# Altium PCB LED.PcbDoc (part 1 of 2)
Units mm, origin at the board's own origin, x right, y up, seen from the top; angles counter-clockwise.
Board outline 98.55 x 98.96 mm, 2 copper layers (Top Layer, Bottom Layer); 101 components, 40 nets, 660 pads, 300 vias.
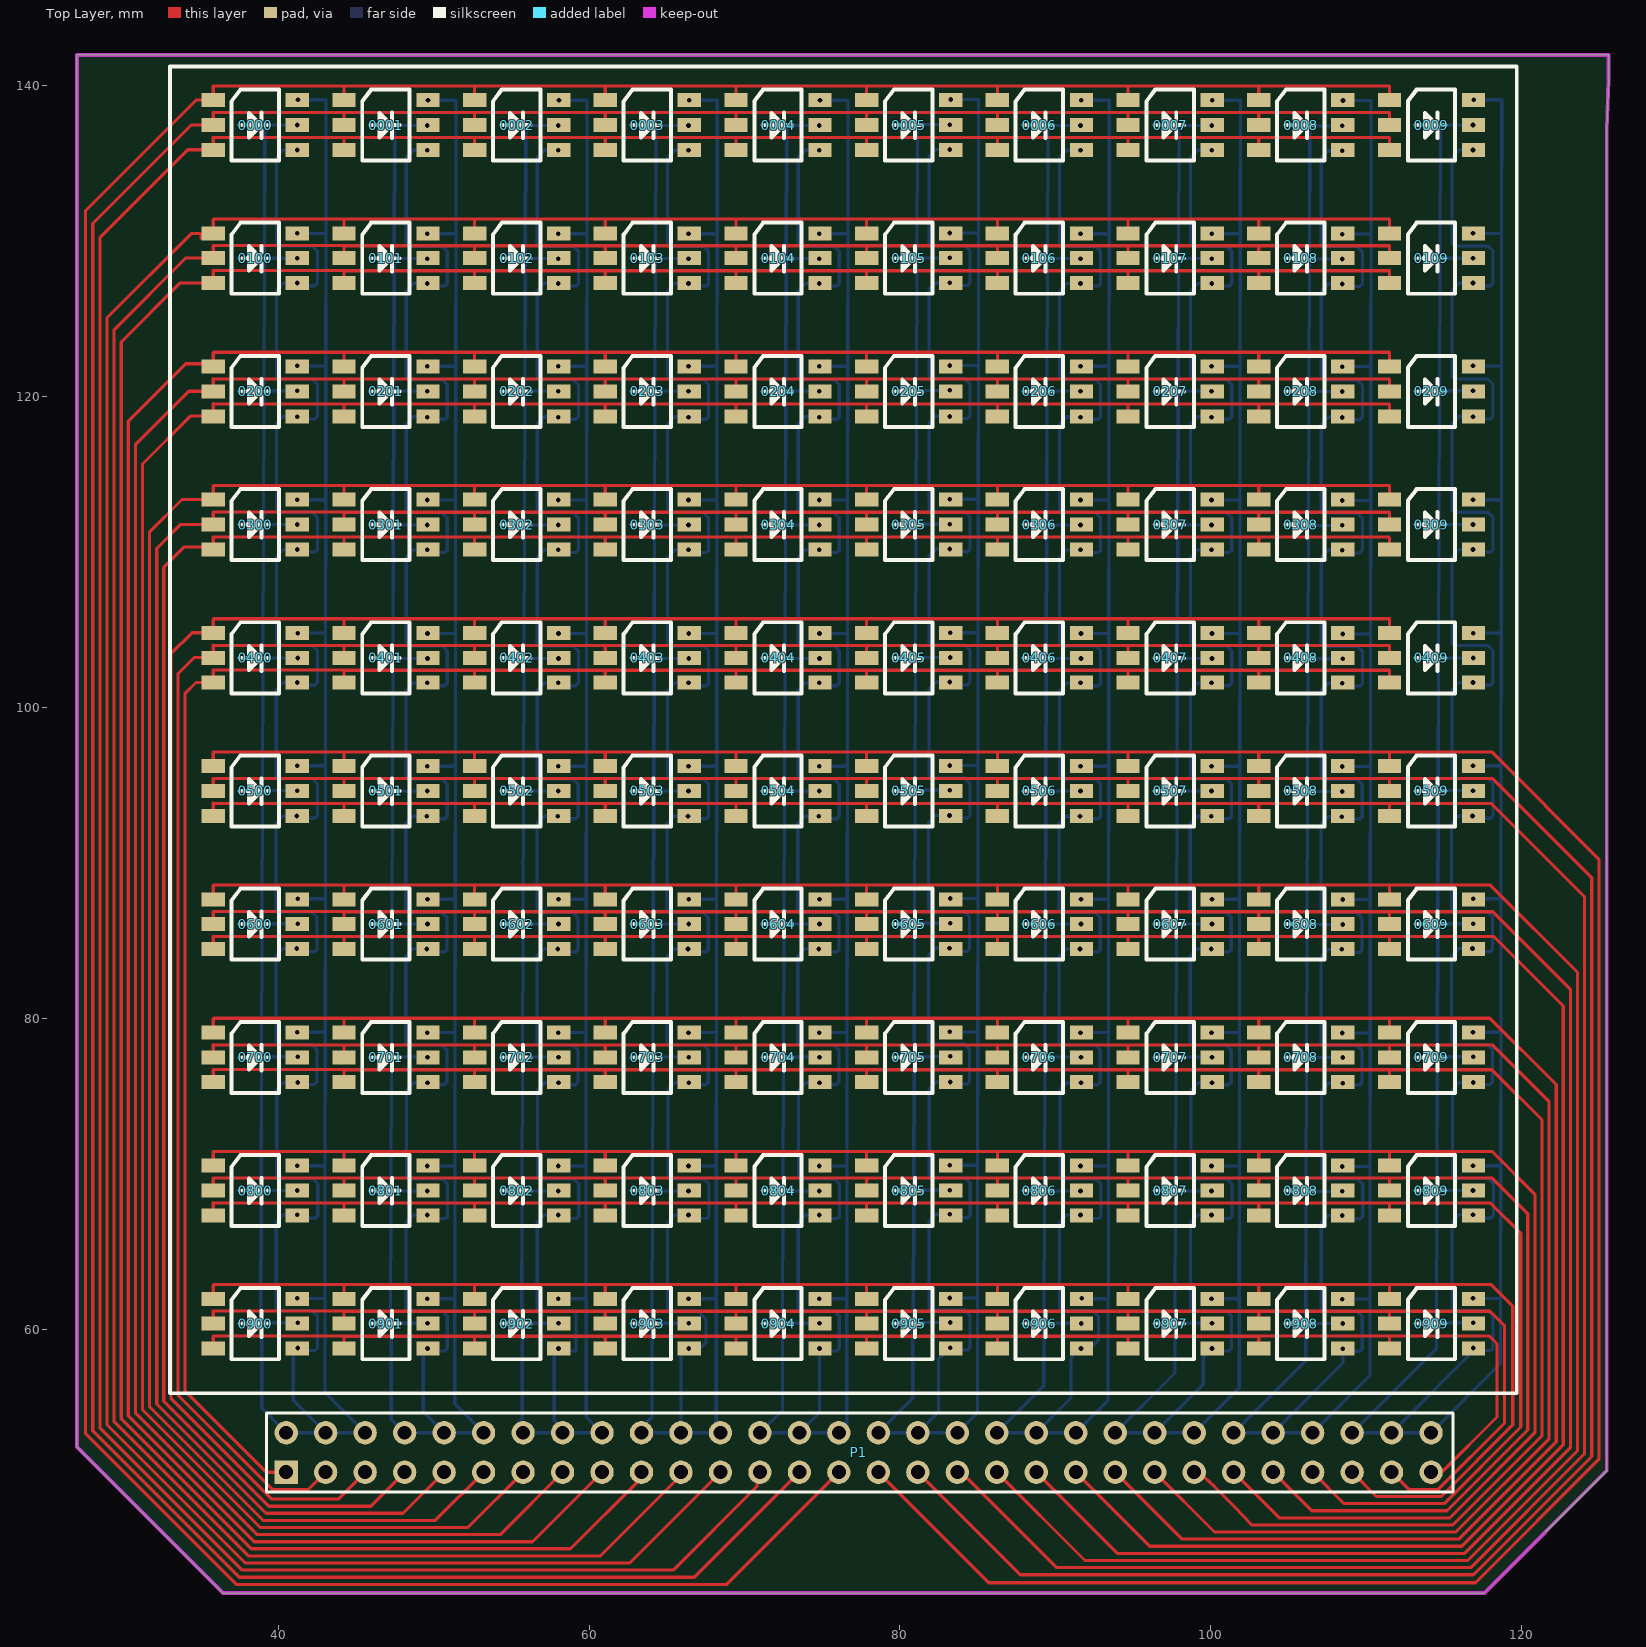
[diagram p0: Top Layer view]
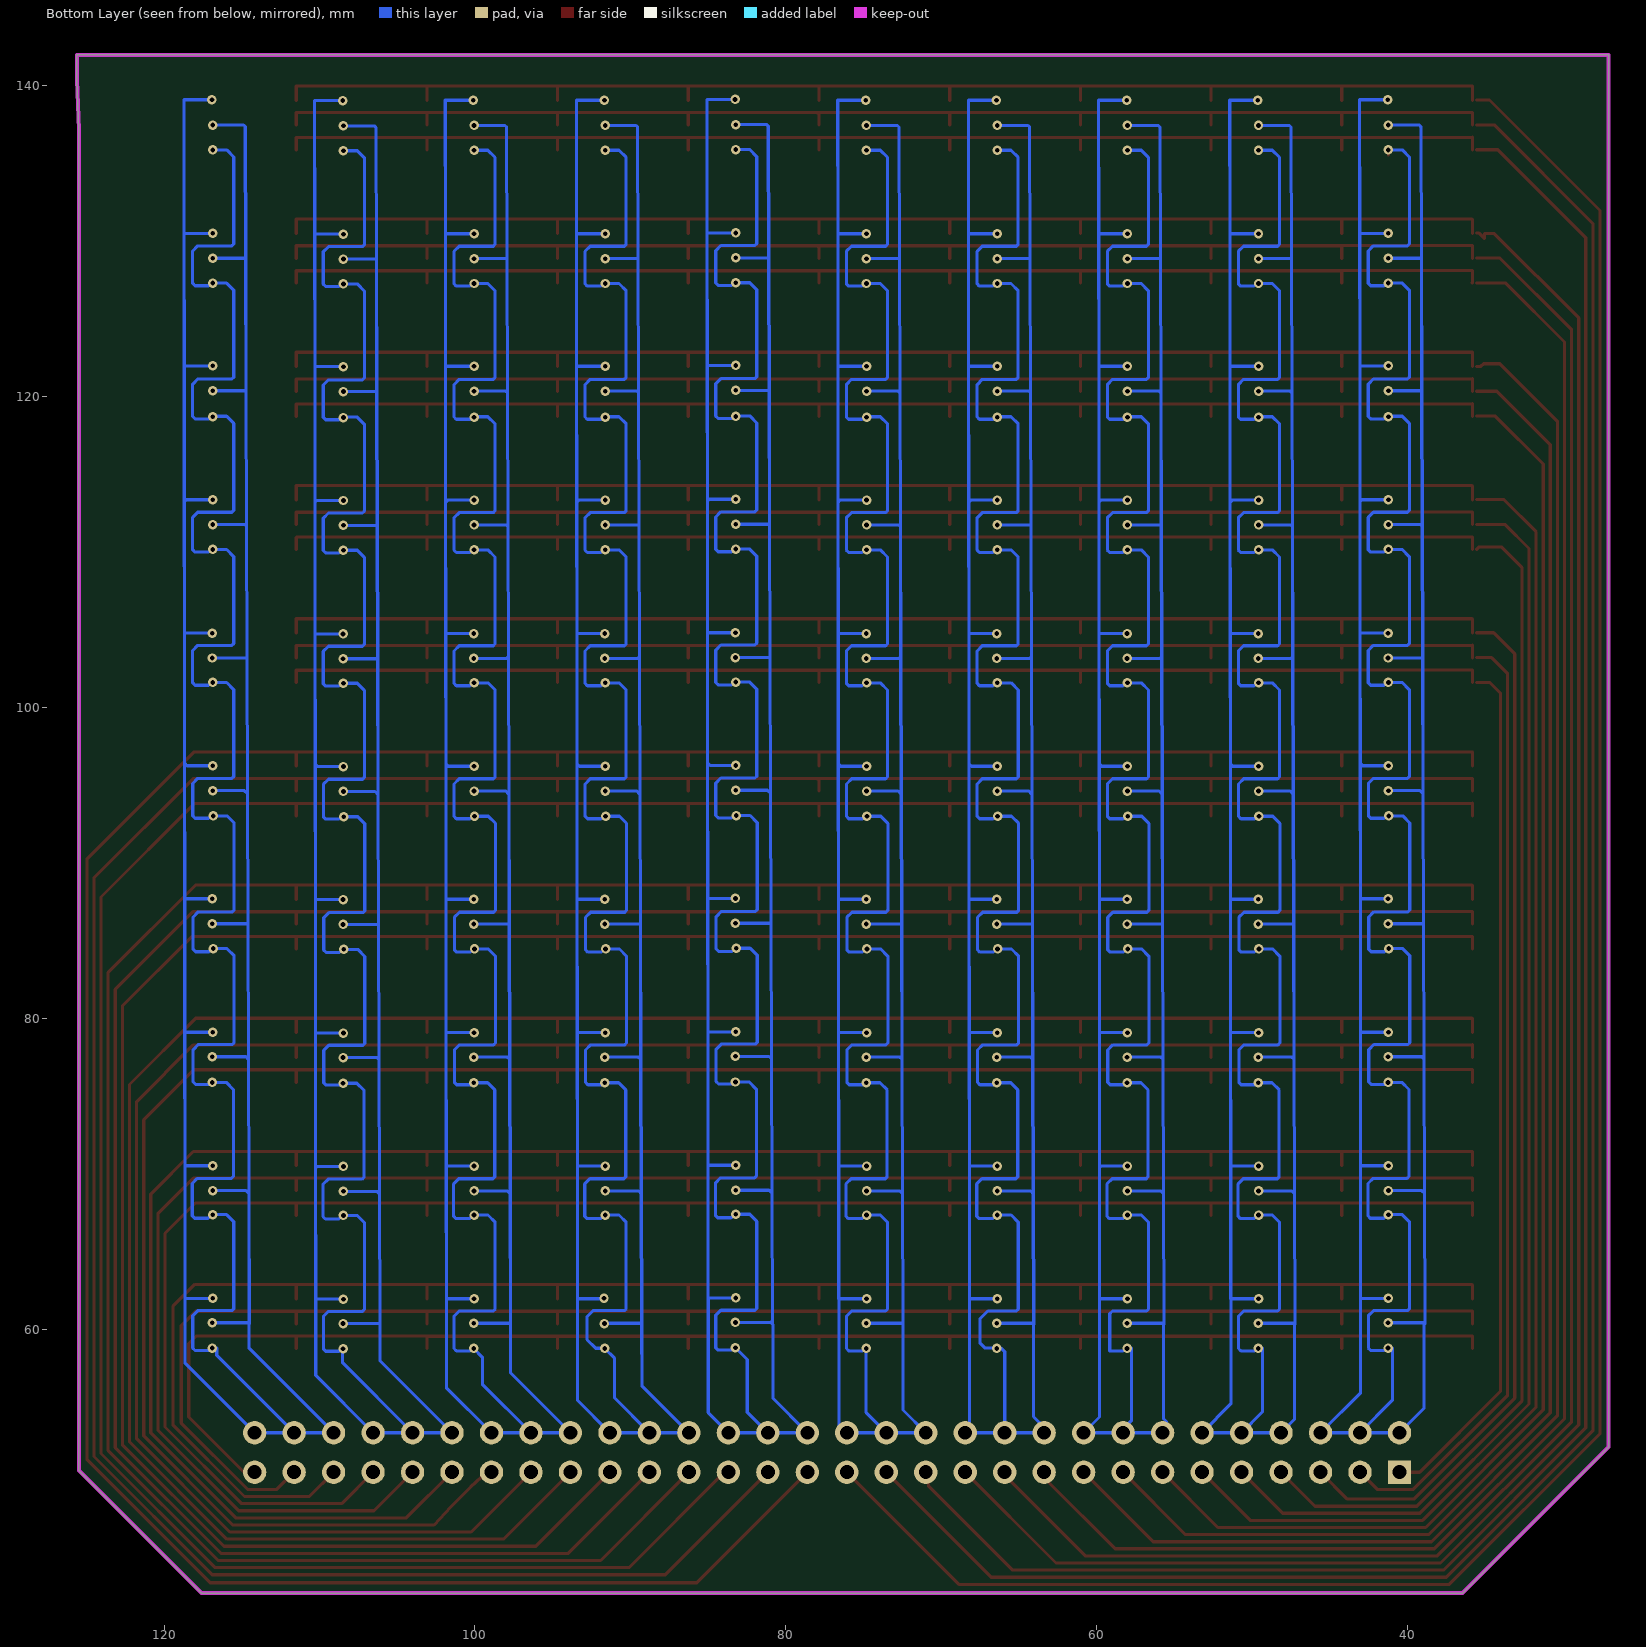
[diagram p1: Bottom Layer view, seen from below]
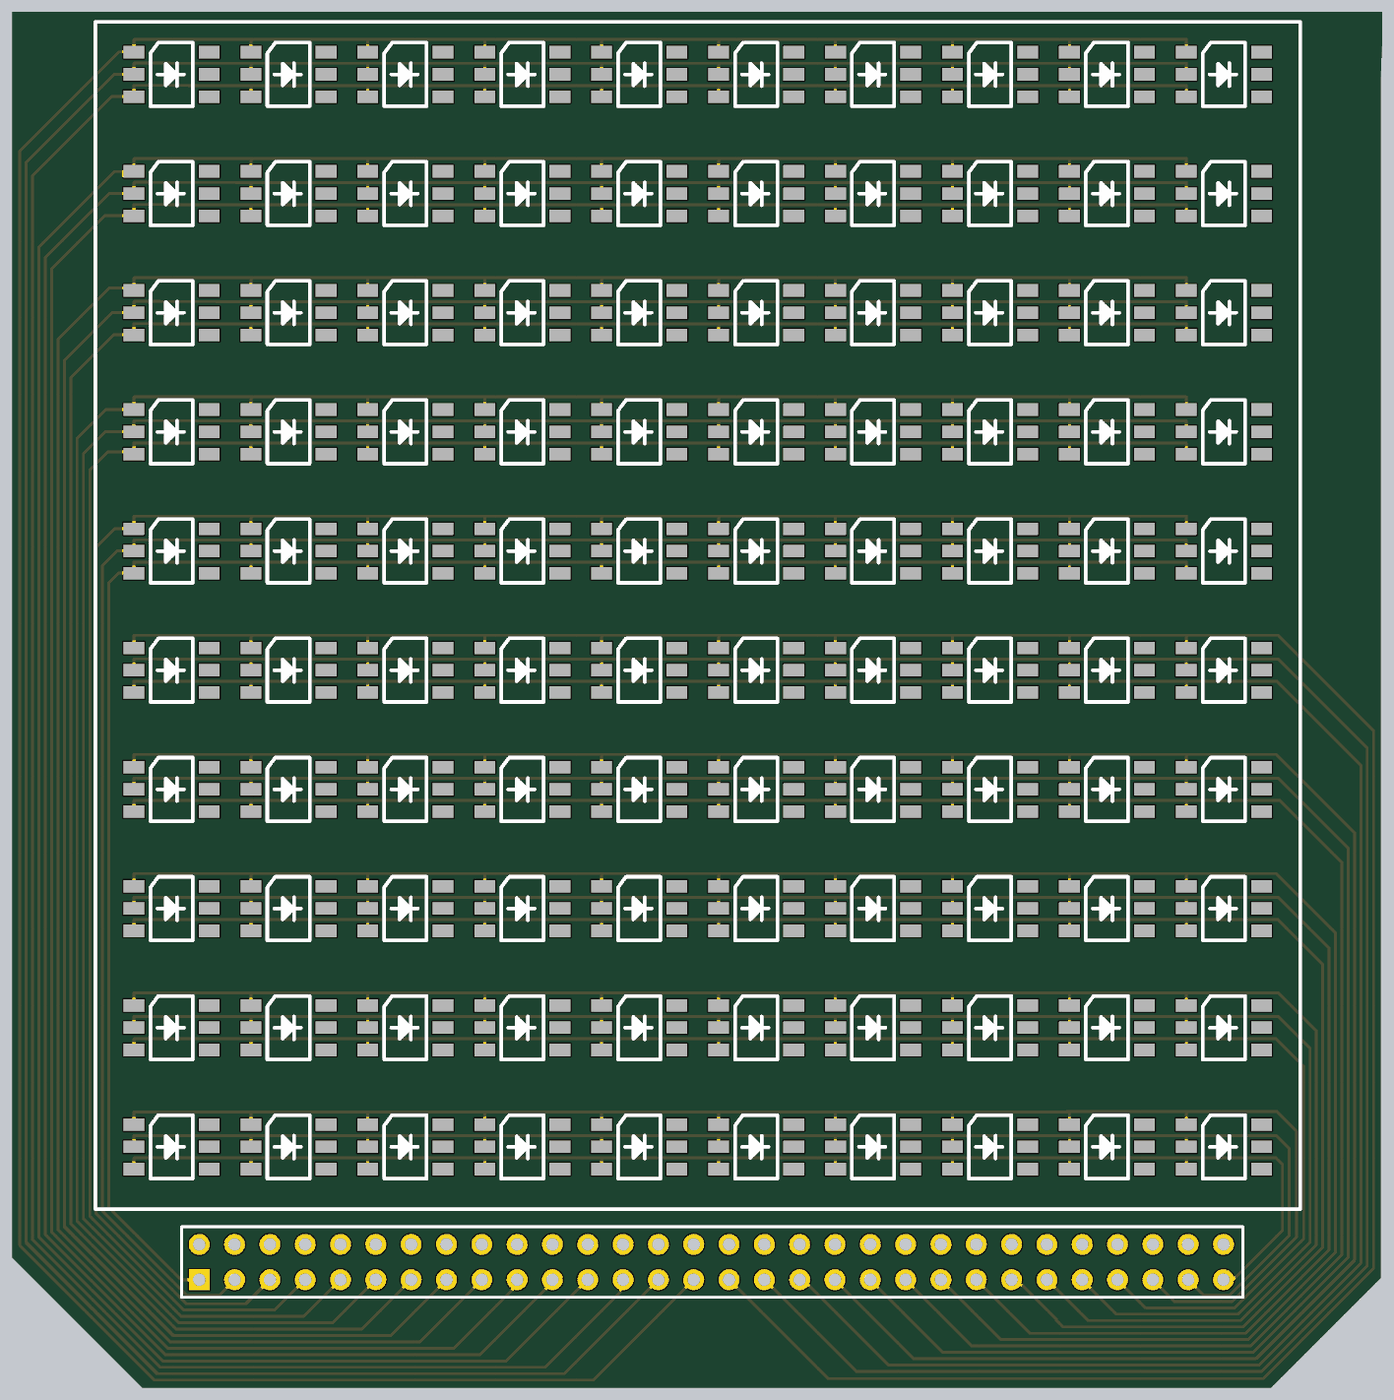
[diagram p3: 3D render of the assembled board from above, using the file's embedded part models]

## Layer stack, top to bottom
Top Solder: solder mask 0.0102, Solder Resist, Dk 3.5
Top Layer: signal copper 0.0356
Dielectric 1: dielectric 0.32, FR-4, Dk 4.8
Bottom Layer: signal copper 0.0356
Bottom Solder: solder mask 0.0102, Solder Resist, Dk 3.5

## Board outline
31.598,47.879 27.051,52.426 27.051,141.986 125.603,141.986 125.603,140.386 125.476,137.185 125.476,50.902 117.602,43.028 36.449,43.028

## Design rules (kind name [scope] priority, off if disabled: settings)
Clearance [All] p1: gap=0.254 ignorepadtopadclearanceinfootprint=FALSE except(0: Arc-Hole Track-Hole SMDPad-Hole THPad-Hole Via-Hole Fill-Hole Poly-Hole Region-Hole Text-Hole; 0.152: Arc-SMDPad Arc-Via Track-SMDPad Track-Via SMDPad-SMDPad SMDPad-Via)
PlaneConnect [All] p1: planeconnectstyle=Direct reliefexpansion=0.508 reliefentries=4 reliefconductorwidth=0.254 reliefairgap=0.254
PolygonConnect [All] p1: connectstyle=Direct reliefconductorwidth=0.254 reliefentries=4 polygonreliefangle="90 Angle" airgapwidth=0.254
RoutingVias [All] p1: holewidth=0.711 width=1.27 viastyle="Through Hole" minholewidth=0.711 minwidth=1.27 maxholewidth=0.711 maxwidth=1.27
SolderMaskExpansion [All] p1: expansion=0.102
Width [All] p1: maxlimit=0.203 minlimit=0.203 preferedwidth=0.203 minimp=50.000000 maximp=50.000000 favimp=50.000000
29 further rules are at their usual default settings.

## Components (designator, comment, footprint, x,y, rotation, side; value= is the part's Value field where it differs from the comment)
0000 "LED-RGB_1" "LED 5050" 38.522,137.477 r0 top
0001 "LED-RGB_1" "LED 5050" 46.931,137.477 r0 top
0002 "LED-RGB_1" "LED 5050" 55.34,137.477 r0 top
0003 "LED-RGB_1" "LED 5050" 63.748,137.477 r0 top
0004 "LED-RGB_1" "LED 5050" 72.157,137.477 r0 top
0005 "LED-RGB_1" "LED 5050" 80.565,137.477 r0 top
0006 "LED-RGB_1" "LED 5050" 88.974,137.477 r0 top
0007 "LED-RGB_1" "LED 5050" 97.382,137.477 r0 top
0008 "LED-RGB_1" "LED 5050" 105.791,137.477 r0 top
0009 "LED-RGB_1" "LED 5050" 114.199,137.477 r0 top
0100 "LED-RGB_1" "LED 5050" 38.522,128.908 r0 top
0101 "LED-RGB_1" "LED 5050" 46.931,128.908 r0 top
0102 "LED-RGB_1" "LED 5050" 55.34,128.908 r0 top
0103 "LED-RGB_1" "LED 5050" 63.748,128.908 r0 top
0104 "LED-RGB_1" "LED 5050" 72.157,128.908 r0 top
0105 "LED-RGB_1" "LED 5050" 80.565,128.908 r0 top
0106 "LED-RGB_1" "LED 5050" 88.974,128.908 r0 top
0107 "LED-RGB_1" "LED 5050" 97.382,128.908 r0 top
0108 "LED-RGB_1" "LED 5050" 105.791,128.908 r0 top
0109 "LED-RGB_1" "LED 5050" 114.199,128.908 r0 top
0200 "LED-RGB_1" "LED 5050" 38.522,120.338 r0 top
0201 "LED-RGB_1" "LED 5050" 46.931,120.338 r0 top
0202 "LED-RGB_1" "LED 5050" 55.34,120.338 r0 top
0203 "LED-RGB_1" "LED 5050" 63.748,120.338 r0 top
0204 "LED-RGB_1" "LED 5050" 72.157,120.338 r0 top
0205 "LED-RGB_1" "LED 5050" 80.565,120.338 r0 top
0206 "LED-RGB_1" "LED 5050" 88.974,120.338 r0 top
0207 "LED-RGB_1" "LED 5050" 97.382,120.338 r0 top
0208 "LED-RGB_1" "LED 5050" 105.791,120.338 r0 top
0209 "LED-RGB_1" "LED 5050" 114.199,120.338 r0 top
0300 "LED-RGB_1" "LED 5050" 38.522,111.769 r0 top
0301 "LED-RGB_1" "LED 5050" 46.931,111.769 r0 top
0302 "LED-RGB_1" "LED 5050" 55.34,111.769 r0 top
0303 "LED-RGB_1" "LED 5050" 63.748,111.769 r0 top
0304 "LED-RGB_1" "LED 5050" 72.157,111.769 r0 top
0305 "LED-RGB_1" "LED 5050" 80.565,111.769 r0 top
0306 "LED-RGB_1" "LED 5050" 88.974,111.769 r0 top
0307 "LED-RGB_1" "LED 5050" 97.382,111.769 r0 top
0308 "LED-RGB_1" "LED 5050" 105.791,111.769 r0 top
0309 "LED-RGB_1" "LED 5050" 114.199,111.769 r0 top
0400 "LED-RGB_1" "LED 5050" 38.522,103.2 r0 top
0401 "LED-RGB_1" "LED 5050" 46.931,103.2 r0 top
0402 "LED-RGB_1" "LED 5050" 55.34,103.2 r0 top
0403 "LED-RGB_1" "LED 5050" 63.748,103.2 r0 top
0404 "LED-RGB_1" "LED 5050" 72.157,103.2 r0 top
0405 "LED-RGB_1" "LED 5050" 80.565,103.2 r0 top
0406 "LED-RGB_1" "LED 5050" 88.974,103.2 r0 top
0407 "LED-RGB_1" "LED 5050" 97.382,103.2 r0 top
0408 "LED-RGB_1" "LED 5050" 105.791,103.2 r0 top
0409 "LED-RGB_1" "LED 5050" 114.199,103.2 r0 top
0500 "LED-RGB_1" "LED 5050" 38.522,94.631 r0 top
0501 "LED-RGB_1" "LED 5050" 46.931,94.631 r0 top
0502 "LED-RGB_1" "LED 5050" 55.34,94.631 r0 top
0503 "LED-RGB_1" "LED 5050" 63.748,94.631 r0 top
0504 "LED-RGB_1" "LED 5050" 72.157,94.631 r0 top
0505 "LED-RGB_1" "LED 5050" 80.565,94.631 r0 top
0506 "LED-RGB_1" "LED 5050" 88.974,94.631 r0 top
0507 "LED-RGB_1" "LED 5050" 97.382,94.631 r0 top
0508 "LED-RGB_1" "LED 5050" 105.791,94.631 r0 top
0509 "LED-RGB_1" "LED 5050" 114.199,94.631 r0 top
0600 "LED-RGB_1" "LED 5050" 38.522,86.062 r0 top
0601 "LED-RGB_1" "LED 5050" 46.931,86.062 r0 top
0602 "LED-RGB_1" "LED 5050" 55.34,86.062 r0 top
0603 "LED-RGB_1" "LED 5050" 63.748,86.062 r0 top
0604 "LED-RGB_1" "LED 5050" 72.157,86.062 r0 top
0605 "LED-RGB_1" "LED 5050" 80.565,86.062 r0 top
0606 "LED-RGB_1" "LED 5050" 88.974,86.062 r0 top
0607 "LED-RGB_1" "LED 5050" 97.382,86.062 r0 top
0608 "LED-RGB_1" "LED 5050" 105.791,86.062 r0 top
0609 "LED-RGB_1" "LED 5050" 114.199,86.062 r0 top
0700 "LED-RGB_1" "LED 5050" 38.522,77.493 r0 top
0701 "LED-RGB_1" "LED 5050" 46.931,77.493 r0 top
0702 "LED-RGB_1" "LED 5050" 55.34,77.493 r0 top
0703 "LED-RGB_1" "LED 5050" 63.748,77.493 r0 top
0704 "LED-RGB_1" "LED 5050" 72.157,77.493 r0 top
0705 "LED-RGB_1" "LED 5050" 80.565,77.493 r0 top
0706 "LED-RGB_1" "LED 5050" 88.974,77.493 r0 top
0707 "LED-RGB_1" "LED 5050" 97.382,77.493 r0 top
0708 "LED-RGB_1" "LED 5050" 105.791,77.493 r0 top
0709 "LED-RGB_1" "LED 5050" 114.199,77.493 r0 top
0800 "LED-RGB_1" "LED 5050" 38.522,68.924 r0 top
0801 "LED-RGB_1" "LED 5050" 46.931,68.924 r0 top
0802 "LED-RGB_1" "LED 5050" 55.34,68.924 r0 top
0803 "LED-RGB_1" "LED 5050" 63.748,68.924 r0 top
0804 "LED-RGB_1" "LED 5050" 72.157,68.924 r0 top
0805 "LED-RGB_1" "LED 5050" 80.565,68.924 r0 top
0806 "LED-RGB_1" "LED 5050" 88.974,68.924 r0 top
0807 "LED-RGB_1" "LED 5050" 97.382,68.924 r0 top
0808 "LED-RGB_1" "LED 5050" 105.791,68.924 r0 top
0809 "LED-RGB_1" "LED 5050" 114.199,68.924 r0 top
0900 "LED-RGB_1" "LED 5050" 38.522,60.355 r0 top
0901 "LED-RGB_1" "LED 5050" 46.931,60.355 r0 top
0902 "LED-RGB_1" "LED 5050" 55.34,60.355 r0 top
0903 "LED-RGB_1" "LED 5050" 63.748,60.355 r0 top
0904 "LED-RGB_1" "LED 5050" 72.157,60.355 r0 top
0905 "LED-RGB_1" "LED 5050" 80.565,60.355 r0 top
0906 "LED-RGB_1" "LED 5050" 88.974,60.355 r0 top
0907 "LED-RGB_1" "LED 5050" 97.382,60.355 r0 top
0908 "LED-RGB_1" "LED 5050" 105.791,60.355 r0 top
0909 "LED-RGB_1" "LED 5050" 114.199,60.355 r0 top
P1 "Header 30X2" HDR2X30 40.513,50.8 r0 top

## Footprints (in the part's own frame and the unit in brackets; to place one, negate y for a bottom-side part, rotate by r counter-clockwise, add the part's x,y. Pads: shape width x height; smd on the part's side, far side on the other; paste and mask are expansions set on the pad)
HDR2X30 [mm] "Connector; Header; 30x2 Position"
  rect 1.5x1.5 hole 0.9: 1(0,0)
  round 1.5 hole 0.9: 2(0,2.54) 3(2.54,0) 4(2.54,2.54) 5(5.08,0) 6(5.08,2.54) 7(7.62,0) 8(7.62,2.54) 9(10.16,0) 10(10.16,2.54) 11(12.7,0) 12(12.7,2.54) 13(15.24,0) 14(15.24,2.54) 15(17.78,0) 16(17.78,2.54) 17(20.32,0) 18(20.32,2.54) 19(22.86,0) 20(22.86,2.54) 21(25.4,0) 22(25.4,2.54) 23(27.94,0) 24(27.94,2.54) 25(30.48,0) 26(30.48,2.54) 27(33.02,0) 28(33.02,2.54) 29(35.56,0) 30(35.56,2.54) 31(38.1,0) 32(38.1,2.54) 33(40.64,0) 34(40.64,2.54) 35(43.18,0) 36(43.18,2.54) 37(45.72,0) 38(45.72,2.54) 39(48.26,0) 40(48.26,2.54) 41(50.8,0) 42(50.8,2.54) 43(53.34,0) 44(53.34,2.54) 45(55.88,0) 46(55.88,2.54) 47(58.42,0) 48(58.42,2.54) 49(60.96,0) 50(60.96,2.54) 51(63.5,0) 52(63.5,2.54) 53(66.04,0) 54(66.04,2.54) 55(68.58,0) 56(68.58,2.54) 57(71.12,0) 58(71.12,2.54) 59(73.66,0) 60(73.66,2.54)
  silkscreen extent -1.27,-1.27 75.06,3.81
"LED 5050" [mm] "白色5050LED"
  rect 1.5x0.9 smd: 1(-2.705,1.6) 2(2.705,1.6) 3(-2.705,0) 4(2.705,0) 5(-2.705,-1.6) 6(2.705,-1.6)
  silkscreen extent -1.52,-2.29 1.52,2.29, body extent -2.7,-2.5 2.7,2.5, height 1.65

## Part data
0000 0001 0002 0003 0004 0005 0006 0007 0008 0009 0100 0101 0102 0103 0104 0105 0106 0107 0108 0109 0200 0201 0202 0203 0204 0205 0206 0207 0208 0209 0300 0301 0302 0303 0304 0305 0306 0307 0308 0309 0400 0401 0402 0403 0404 0405 0406 0407 0408 0409 0500 0501 0502 0503 0504 0505 0506 0507 0508 0509 0600 0601 0602 0603 0604 0605 0606 0607 0608 0609 0700 0701 0702 0703 0704 0705 0706 0707 0708 0709 0800 0801 0802 0803 0804 0805 0806 0807 0808 0809 0900 0901 0902 0903 0904 0905 0906 0907 0908 0909: "三基色LED,正负脚相对", 学习资源=www.o
P1: "Header, 30-Pin, Dual row", LatestRevisionDate=17-Jul-2002, LatestRevisionNote="Re-released for DXP Platform.", Publisher="Altium Limited"

## Via types
v1: diameter 0.61, hole 0.305, Top Layer to Bottom Layer, 300 vias

## Nets (pads, with @x,y where several pads share a name; then routed paths per layer and width w, separated by ;. In a path a pad name is that pad's centre, name@x,y a point inside that pad or via, vN(x,y) a via of type N, cw(c..) or ccw(c..) an arc to the next point about the centre after c; other vN are vias at no path point)
A00B: 0000.1 0001.1 0002.1 0003.1 0004.1 0005.1 0006.1 0007.1 0008.1 0009.1 P1.29 | length 229.9
  Top Layer w0.203: 0000.1@35.538,139.09 34.722,139.09 27.61,131.978 27.61,53.28 37.303,43.586 68.859,43.586 P1.29@76.073,50.8 ; 0000.1@35.817,139.077 35.817,139.969 35.84,139.991 44.272,139.991 ; 0001.1@44.226,139.077 44.226,139.945 44.272,139.991 ; 0002.1@52.634,139.077 52.634,139.921 52.705,139.991 ; 0003.1@61.043,139.077 61.043,139.984 61.036,139.991 ; 0004.1@69.452,139.077 69.452,139.983 69.444,139.991 ; 0005.1@77.86,139.077 77.86,139.975 77.877,139.991 ; 0006.1@86.269,139.077 86.269,139.981 86.259,139.991 ; 0007.1@94.677,139.077 94.677,139.977 94.691,139.991 ; 0008.1@103.086,139.077 103.086,139.966 103.111,139.991 ; 0009.1@111.494,139.077 111.494,139.954 ; 111.494,139.991 103.111,139.991 ; 44.272,139.991 52.705,139.991 ; 52.705,139.991 61.036,139.991 ; 61.036,139.991 69.444,139.991 ; 69.444,139.991 77.877,139.991 ; 77.877,139.991 86.259,139.991 ; 86.259,139.991 94.691,139.991 ; 94.691,139.991 103.111,139.991
A00G: 0000.5 0001.5 0002.5 0003.5 0004.5 0005.5 0006.5 0007.5 0008.5 0009.5 P1.25 | length 219
  Top Layer w0.203: 0000.5@35.538,135.89 34.188,135.89 28.524,130.226 28.524,53.659 37.682,44.501 65.405,44.501 70.806,49.902 70.806,50.613 P1.25@70.993,50.8 ; 0000.5@35.817,135.876 35.817,136.685 35.814,136.688 44.247,136.675 ; 0001.5@44.226,135.876 44.226,136.654 44.247,136.675 ; 0002.5@52.634,135.876 52.634,136.619 52.578,136.675 ; 0003.5@61.043,135.876 61.043,136.631 61.087,136.675 ; 0004.5@69.452,135.876 69.452,136.642 69.418,136.675 ; 0005.5@77.86,135.876 77.86,136.659 77.877,136.675 ; 0006.5@86.269,135.876 86.269,136.64 86.233,136.675 ; 0007.5@94.677,135.876 94.677,136.638 94.641,136.675 ; 0008.5@103.086,135.876 103.086,136.675 ; 0009.5@111.494,135.876 111.494,136.675 103.086,136.675 ; 44.247,136.675 52.578,136.675 ; 52.578,136.675 61.087,136.675 ; 61.087,136.675 69.418,136.675 ; 69.418,136.675 77.877,136.675 ; 77.877,136.675 86.233,136.675 ; 86.233,136.675 94.641,136.675 ; 94.641,136.675 103.086,136.675
A00R: 0000.3 0001.3 0002.3 0003.3 0004.3 0005.3 0006.3 0007.3 0008.3 0009.3 P1.27 | length 223.7
  Top Layer w0.203: 0000.3@35.538,137.49 34.417,137.49 28.067,131.14 28.067,53.469 37.493,44.044 66.777,44.044 P1.27@73.533,50.8 ; 0000.3@35.817,137.477 35.817,138.285 35.814,138.288 44.272,138.275 ; 0001.3@44.226,137.477 44.226,138.229 44.272,138.275 ; 0002.3@52.634,137.477 52.634,138.23 52.68,138.275 ; 0003.3@61.043,137.477 61.043,138.192 60.96,138.275 ; 0004.3@69.452,137.477 69.452,138.267 69.444,138.275 ; 0005.3@77.86,137.477 77.86,138.157 77.978,138.275 ; 0006.3@86.269,137.477 86.269,138.235 86.309,138.275 ; 0007.3@94.677,137.477 94.677,138.264 94.666,138.275 ; 0008.3@103.086,137.477 103.086,138.25 103.111,138.275 ; 0009.3@111.494,137.477 111.494,138.213 ; 111.494,138.275 103.111,138.275 ; 44.272,138.275 52.68,138.275 ; 52.68,138.275 60.96,138.275 ; 60.96,138.275 69.444,138.275 ; 69.444,138.275 77.978,138.275 ; 77.978,138.275 86.309,138.275 ; 86.309,138.275 94.666,138.275 ; 94.666,138.275 103.111,138.275
A01B: 0100.1 0101.1 0102.1 0103.1 0104.1 0105.1 0106.1 0107.1 0108.1 0109.1 P1.23 | length 210.9
  Top Layer w0.203: 0100.1@35.538,130.521 35.389,130.521 35.041,130.173 35.041,130.495 34.406,130.495 28.981,125.07 28.981,53.848 37.871,44.958 62.611,44.958 P1.23@68.453,50.8 ; 0100.1@35.814,130.511 0100.1@35.817,130.508 35.817,131.4 35.84,131.422 44.272,131.422 ; 0101.1@44.226,130.508 44.226,131.376 44.272,131.422 ; 0102.1@52.634,130.508 52.634,131.351 52.705,131.422 ; 0103.1@61.043,130.508 61.043,131.415 61.036,131.422 ; 0104.1@69.452,130.508 69.452,131.414 69.444,131.422 ; 0105.1@77.86,130.508 77.86,131.406 77.877,131.422 ; 0106.1@86.269,130.508 86.269,131.412 86.259,131.422 ; 0107.1@94.677,130.508 94.677,131.408 94.691,131.422 ; 0108.1@103.086,130.508 103.086,131.396 103.111,131.422 ; 0109.1@111.494,130.508 111.494,131.385 ; 111.494,131.422 103.111,131.422 ; 44.272,131.422 52.705,131.422 ; 52.705,131.422 61.036,131.422 ; 61.036,131.422 69.444,131.422 ; 69.444,131.422 77.877,131.422 ; 77.877,131.422 86.259,131.422 ; 86.259,131.422 94.691,131.422 ; 94.691,131.422 103.111,131.422
A01G: 0100.5 0101.5 0102.5 0103.5 0104.5 0105.5 0106.5 0107.5 0108.5 0109.5 P1.19 | length 199.5
  Top Layer w0.203: 0100.5@35.538,127.321 33.697,127.321 29.896,123.52 29.896,54.242 38.265,45.872 58.801,45.872 63.125,50.196 63.125,50.552 P1.19@63.373,50.8 ; 0100.5@35.84,127.329 0100.5@35.817,127.307 35.817,128.116 35.814,128.119 44.247,128.106 ; 0101.5@44.226,127.307 44.226,128.085 44.247,128.106 ; 0102.5@52.634,127.307 52.634,128.05 52.578,128.106 ; 0103.5@61.043,127.307 61.043,128.062 61.087,128.106 ; 0104.5@69.452,127.307 69.452,128.073 69.418,128.106 ; 0105.5@77.86,127.307 77.86,128.09 77.877,128.106 ; 0106.5@86.269,127.307 86.269,128.07 86.233,128.106 ; 0107.5@94.677,127.307 94.677,128.069 94.641,128.106 ; 0108.5@103.086,127.307 103.086,128.106 ; 0109.5@111.494,127.307 111.494,128.106 103.086,128.106 ; 44.247,128.106 52.578,128.106 ; 52.578,128.106 61.087,128.106 ; 61.087,128.106 69.418,128.106 ; 69.418,128.106 77.877,128.106 ; 77.877,128.106 86.233,128.106 ; 86.233,128.106 94.641,128.106 ; 94.641,128.106 103.086,128.106
A01R: 0100.3 0101.3 0102.3 0103.3 0104.3 0105.3 0106.3 0107.3 0108.3 0109.3 P1.21 | length 204.4
  Top Layer w0.203: 0100.3@35.538,128.921 34.052,128.921 29.439,124.308 29.439,54.052 38.076,45.415 60.731,45.415 65.913,50.597 P1.21@65.913,50.8 ; 0100.3@35.817,128.908 35.817,129.716 35.814,129.719 44.272,129.706 ; 0101.3@44.226,128.908 44.226,129.66 44.272,129.706 ; 0102.3@52.634,128.908 52.634,129.661 52.68,129.706 ; 0103.3@61.043,128.908 61.043,129.623 60.96,129.706 ; 0104.3@69.452,128.908 69.452,129.698 69.444,129.706 ; 0105.3@77.86,128.908 77.86,129.588 77.978,129.706 ; 0106.3@86.269,128.908 86.269,129.666 86.309,129.706 ; 0107.3@94.677,128.908 94.677,129.695 94.666,129.706 ; 0108.3@103.086,128.908 103.086,129.681 103.111,129.706 ; 0109.3@111.494,128.908 111.494,129.644 ; 111.494,129.706 103.111,129.706 ; 44.272,129.706 52.68,129.706 ; 52.68,129.706 60.96,129.706 ; 60.96,129.706 69.444,129.706 ; 69.444,129.706 77.978,129.706 ; 77.978,129.706 86.309,129.706 ; 86.309,129.706 94.666,129.706 ; 94.666,129.706 103.111,129.706
A02B: 0200.1 0201.1 0202.1 0203.1 0204.1 0205.1 0206.1 0207.1 0208.1 0209.1 P1.17 | length 268.8
  Top Layer w0.203: 0200.1@35.538,121.952 35.274,121.952 35.103,122.123 34.057,122.123 30.353,118.419 30.353,54.431 38.454,46.33 56.363,46.33 P1.17@60.833,50.8 ; 35.814,122.834 35.814,121.942 0200.1@35.817,121.939 35.817,122.831 35.84,122.853 44.272,122.853 ; 35.836,122.856 111.494,122.856 111.494,122.853 ; 0201.1@44.223,121.942 44.223,122.81 ; 0201.1@44.226,121.939 44.226,122.807 44.272,122.853 ; 0202.1@52.634,121.939 52.634,122.782 52.705,122.853 ; 0203.1@61.043,121.939 61.043,122.846 61.036,122.853 ; 0204.1@69.452,121.939 69.452,122.845 69.444,122.853 ; 0205.1@77.86,121.939 77.86,122.837 77.877,122.853 ; 0206.1@86.269,121.939 86.269,122.843 86.259,122.853 ; 0207.1@94.677,121.939 94.677,122.839 94.691,122.853 ; 0208.1@103.086,121.939 103.086,122.827 103.111,122.853 ; 0209.1@111.494,121.939 111.494,122.853 ; 44.272,122.853 52.705,122.853 ; 52.705,122.853 61.036,122.853 ; 61.036,122.853 69.444,122.853 ; 69.444,122.853 77.877,122.853 ; 77.877,122.853 86.259,122.853 ; 86.259,122.853 94.691,122.853 ; 94.691,122.853 103.111,122.853 ; 103.111,122.853 111.494,122.853
A02G: 0200.5 0201.5 0202.5 0203.5 0204.5 0205.5 0206.5 0207.5 0208.5 0209.5 P1.13 | length 204.3
  Top Layer w0.203: 0200.5@35.538,118.752 34.348,118.752 31.267,115.672 31.267,54.81 38.833,47.244 52.197,47.244 P1.13@55.753,50.8 ; 35.811,119.553 44.244,119.54 59.244,119.54 ; 0201.5@44.223,118.742 44.223,119.519 ; 0201.5@44.226,118.738 44.226,119.516 44.247,119.537 ; 0202.5@52.634,118.738 52.634,119.481 52.578,119.537 ; 0203.5@61.043,118.738 61.043,119.493 61.087,119.537 ; 0204.5@69.452,118.738 69.452,119.504 69.418,119.537 ; 0205.5@77.86,118.738 77.86,119.521 77.877,119.537 ; 0206.5@86.269,118.738 86.269,119.501 86.233,119.537 ; 0207.5@94.677,118.738 94.677,119.5 94.641,119.537 ; 0208.5@103.086,118.738 103.086,119.537 ; 0209.5@111.494,118.738 111.494,119.537 103.086,119.537 ; 35.814,119.55 35.817,119.547 0200.5@35.817,118.738 35.814,118.742 35.814,119.55 ; 35.814,119.55 44.247,119.537 ; 44.247,119.537 52.578,119.537 ; 52.578,119.537 61.087,119.537 ; 61.087,119.537 69.418,119.537 ; 69.418,119.537 77.877,119.537 ; 77.877,119.537 86.233,119.537 ; 86.233,119.537 94.641,119.537 ; 94.641,119.537 103.086,119.537
A02R: 0200.3 0201.3 0202.3 0203.3 0204.3 0205.3 0206.3 0207.3 0208.3 0209.3 P1.15 | length 261.9
  Top Layer w0.203: 0200.3@35.538,120.352 34.246,120.352 30.81,116.916 30.81,54.62 38.644,46.787 54.28,46.787 P1.15@58.293,50.8 ; 35.811,121.153 44.269,121.14 111.494,121.14 ; 0201.3@44.223,120.342 44.223,121.094 ; 0201.3@44.226,120.338 44.226,121.091 44.272,121.137 ; 0202.3@52.634,120.338 52.634,121.092 52.68,121.137 ; 0203.3@61.043,120.338 61.043,121.054 60.96,121.137 ; 0204.3@69.452,120.338 69.452,121.129 69.444,121.137 ; 0205.3@77.86,120.338 77.86,121.019 77.978,121.137 ; 0206.3@86.269,120.338 86.269,121.097 86.309,121.137 ; 0207.3@94.677,120.338 94.677,121.126 94.666,121.137 ; 0208.3@103.086,120.338 103.086,121.112 103.111,121.137 ; 0209.3@111.494,120.338 111.494,121.075 ; 111.494,121.137 103.111,121.137 ; 35.814,121.15 35.817,121.147 0200.3@35.817,120.338 35.814,120.342 35.814,121.15 ; 35.814,121.15 44.272,121.137 ; 44.272,121.137 52.68,121.137 ; 52.68,121.137 60.96,121.137 ; 60.96,121.137 69.444,121.137 ; 69.444,121.137 77.978,121.137 ; 77.978,121.137 86.309,121.137 ; 86.309,121.137 94.666,121.137 ; 94.666,121.137 103.111,121.137
A03B: 0300.1 0301.1 0302.1 0303.1 0304.1 0305.1 0306.1 0307.1 0308.1 0309.1 P1.11 | length 171.6
  Top Layer w0.203: 0300.1@35.538,113.383 33.805,113.383 31.725,111.303 31.725,54.999 39.023,47.701 50.114,47.701 P1.11@53.213,50.8 ; 0300.1@35.817,113.37 35.817,114.262 35.84,114.284 44.272,114.284 ; 0301.1@44.226,113.37 44.226,114.238 44.272,114.284 ; 0302.1@52.634,113.37 52.634,114.213 52.705,114.284 ; 0303.1@61.043,113.37 61.043,114.277 61.036,114.284 ; 0304.1@69.452,113.37 69.452,114.276 69.444,114.284 ; 0305.1@77.86,113.37 77.86,114.268 77.877,114.284 ; 0306.1@86.269,113.37 86.269,114.274 86.259,114.284 ; 0307.1@94.677,113.37 94.677,114.27 94.691,114.284 ; 0308.1@103.086,113.37 103.086,114.258 103.111,114.284 ; 0309.1@111.494,113.37 111.494,114.247 ; 111.494,114.284 103.111,114.284 ; 44.272,114.284 52.705,114.284 ; 52.705,114.284 61.036,114.284 ; 61.036,114.284 69.444,114.284 ; 69.444,114.284 77.877,114.284 ; 77.877,114.284 86.259,114.284 ; 86.259,114.284 94.691,114.284 ; 94.691,114.284 103.111,114.284
A03G: 0300.5 0301.5 0302.5 0303.5 0304.5 0305.5 0306.5 0307.5 0308.5 0309.5 P1.7 | length 160.1
  Top Layer w0.203: 0300.5@35.538,110.183 35.383,110.338 33.96,110.338 32.639,109.017 32.639,55.378 39.401,48.616 45.949,48.616 P1.7@48.133,50.8 ; 0300.5@35.817,110.169 35.817,110.977 35.814,110.981 44.247,110.968 ; 0301.5@44.226,110.169 44.226,110.947 44.247,110.968 ; 0302.5@52.634,110.169 52.634,110.912 52.578,110.968 ; 0303.5@61.043,110.169 61.043,110.924 61.087,110.968 ; 0304.5@69.452,110.169 69.452,110.935 69.418,110.968 ; 0305.5@77.86,110.169 77.86,110.952 77.877,110.968 ; 0306.5@86.269,110.169 86.269,110.932 86.233,110.968 ; 0307.5@94.677,110.169 94.677,110.931 94.641,110.968 ; 0308.5@103.086,110.169 103.086,110.968 ; 111.469,110.968 103.086,110.968 ; 0309.5@111.494,110.169 111.494,110.931 ; 44.247,110.968 52.578,110.968 ; 52.578,110.968 61.087,110.968 ; 61.087,110.968 69.418,110.968 ; 69.418,110.968 77.877,110.968 ; 77.877,110.968 86.233,110.968 ; 86.233,110.968 94.641,110.968 ; 94.641,110.968 103.086,110.968
A03R: 0300.3 0301.3 0302.3 0303.3 0304.3 0305.3 0306.3 0307.3 0308.3 0309.3 P1.9 | length 165.4
  Top Layer w0.203: 0300.3@35.538,111.783 33.729,111.783 32.182,110.236 32.182,55.189 39.212,48.158 48.031,48.158 P1.9@50.673,50.8 ; 0300.3@35.817,111.769 35.817,112.578 35.814,112.581 44.272,112.568 ; 0301.3@44.226,111.769 44.226,112.522 44.272,112.568 ; 0302.3@52.634,111.769 52.634,112.523 52.68,112.568 ; 0303.3@61.043,111.769 61.043,112.485 60.96,112.568 ; 0304.3@69.452,111.769 69.452,112.56 69.444,112.568 ; 0305.3@77.86,111.769 77.86,112.45 77.978,112.568 ; 0306.3@86.269,111.769 86.269,112.528 86.309,112.568 ; 0307.3@94.677,111.769 94.677,112.557 94.666,112.568 ; 0308.3@103.086,111.769 103.086,112.543 103.111,112.568 ; 0309.3@111.494,111.769 111.494,112.568 103.111,112.568 ; 44.272,112.568 52.68,112.568 ; 52.68,112.568 60.96,112.568 ; 60.96,112.568 69.444,112.568 ; 69.444,112.568 77.978,112.568 ; 77.978,112.568 86.309,112.568 ; 86.309,112.568 94.666,112.568 ; 94.666,112.568 103.111,112.568
A04B: 0400.1 0401.1 0402.1 0403.1 0404.1 0405.1 0406.1 0407.1 0408.1 0409.1 P1.5 | length 151.6
  Top Layer w0.203: 0400.1@35.538,104.814 34.456,104.814 33.096,103.454 33.096,55.567 39.591,49.073 43.866,49.073 P1.5@45.593,50.8 ; 0400.1@35.817,104.801 35.817,105.693 35.84,105.715 44.272,105.715 ; 0401.1@44.226,104.801 44.226,105.669 44.272,105.715 ; 0402.1@52.634,104.801 52.634,105.644 52.705,105.715 ; 0403.1@61.043,104.801 61.043,105.708 61.036,105.715 ; 0404.1@69.452,104.801 69.452,105.707 69.444,105.715 ; 0405.1@77.86,104.801 77.86,105.699 77.877,105.715 ; 0406.1@86.269,104.801 86.269,105.705 86.259,105.715 ; 0407.1@94.677,104.801 94.677,105.701 94.691,105.715 ; 0408.1@103.086,104.801 103.086,105.689 103.111,105.715 ; 0409.1@111.494,104.801 111.494,105.678 ; 111.494,105.715 103.111,105.715 ; 44.272,105.715 52.705,105.715 ; 52.705,105.715 61.036,105.715 ; 61.036,105.715 69.444,105.715 ; 69.444,105.715 77.877,105.715 ; 77.877,105.715 86.259,105.715 ; 86.259,105.715 94.691,105.715 ; 94.691,105.715 103.111,105.715
A04G: 0400.5 0401.5 0402.5 0403.5 0404.5 0405.5 0406.5 0407.5 0408.5 0409.5 P1.1 | length 139.2
  Top Layer w0.203: 0400.5@35.538,101.614 34.71,101.614 34.011,100.914 34.011,98.72 34.011,56.007 39.218,50.8 P1.1@40.513,50.8 ; 0400.5@35.817,101.6 35.817,102.408 35.814,102.412 44.247,102.399 ; 0401.5@44.226,101.6 44.226,102.378 44.247,102.399 ; 0402.5@52.634,101.6 52.634,102.343 52.578,102.399 ; 0403.5@61.043,101.6 61.043,102.355 61.087,102.399 ; 0404.5@69.452,101.6 69.452,102.366 69.418,102.399 ; 0405.5@77.86,101.6 77.86,102.383 77.877,102.399 ; 0406.5@86.269,101.6 86.269,102.363 86.233,102.399 ; 0407.5@94.677,101.6 94.677,102.362 94.641,102.399 ; 0408.5@103.086,101.6 103.086,102.399 ; 0409.5@111.494,101.6 111.494,102.399 103.086,102.399 ; 44.247,102.399 52.578,102.399 ; 52.578,102.399 61.087,102.399 ; 61.087,102.399 69.418,102.399 ; 69.418,102.399 77.877,102.399 ; 77.877,102.399 86.233,102.399 ; 86.233,102.399 94.641,102.399 ; 94.641,102.399 103.086,102.399
A04R: 0400.3 0401.3 0402.3 0403.3 0404.3 0405.3 0406.3 0407.3 0408.3 0409.3 P1.3 | length 145.1
  Top Layer w0.203: 0400.3@35.538,103.214 34.583,103.214 33.553,102.184 33.553,55.757 39.616,49.694 41.947,49.694 P1.3@43.053,50.8 ; 0400.3@35.817,103.2 35.817,104.009 35.814,104.012 44.272,103.999 ; 0401.3@44.226,103.2 44.226,103.953 44.272,103.999 ; 0402.3@52.634,103.2 52.634,103.954 52.68,103.999 ; 0403.3@61.043,103.2 61.043,103.916 60.96,103.999 ; 0404.3@69.452,103.2 69.452,103.991 69.444,103.999 ; 0405.3@77.86,103.2 77.86,103.881 77.978,103.999 ; 0406.3@86.269,103.2 86.269,103.959 86.309,103.999 ; 0407.3@94.677,103.2 94.677,103.988 94.666,103.999 ; 0408.3@103.086,103.2 103.086,103.974 103.111,103.999 ; 0409.3@111.494,103.2 111.494,103.937 ; 111.494,103.999 103.111,103.999 ; 44.272,103.999 52.68,103.999 ; 52.68,103.999 60.96,103.999 ; 60.96,103.999 69.444,103.999 ; 69.444,103.999 77.978,103.999 ; 77.978,103.999 86.309,103.999 ; 86.309,103.999 94.666,103.999 ; 94.666,103.999 103.111,103.999
A05B: 0500.1 0501.1 0502.1 0503.1 0504.1 0505.1 0506.1 0507.1 0508.1 0509.1 P1.31 | length 192.4
  Top Layer w0.203: 0500.1@35.817,96.232 35.817,97.124 35.84,97.146 44.272,97.146 ; 0501.1@44.226,96.232 44.226,97.1 44.272,97.146 ; 0502.1@52.634,96.232 52.634,97.075 52.705,97.146 ; 0503.1@61.043,96.232 61.043,97.139 61.036,97.146 ; 0504.1@69.452,96.232 69.452,97.138 69.444,97.146 ; 0505.1@77.86,96.232 77.86,97.13 77.877,97.146 ; P1.31@78.613,50.8 85.725,43.688 117.03,43.688 124.968,51.626 124.968,90.246 118.068,97.146 111.532,97.146 ; 0506.1@86.269,96.232 86.269,97.136 86.259,97.146 ; 0507.1@94.677,96.232 94.677,97.132 94.691,97.146 ; 0508.1@103.086,96.232 103.086,97.12 103.111,97.146 ; 0509.1@111.494,96.232 111.494,97.109 111.532,97.146 ; 44.272,97.146 52.705,97.146 ; 52.705,97.146 61.036,97.146 ; 61.036,97.146 69.444,97.146 ; 69.444,97.146 77.877,97.146 ; 77.877,97.146 86.259,97.146 ; 86.259,97.146 94.691,97.146 ; 94.691,97.146 103.111,97.146 ; 103.111,97.146 111.532,97.146
A05G: 0500.5 0501.5 0502.5 0503.5 0504.5 0505.5 0506.5 0507.5 0508.5 0509.5 P1.35 | length 180.6
  Top Layer w0.203: 0500.5@35.817,93.031 35.817,93.839 35.814,93.843 44.247,93.83 ; 0501.5@44.226,93.031 44.226,93.809 44.247,93.83 ; 0502.5@52.634,93.031 52.634,93.774 52.578,93.83 ; 0503.5@61.043,93.031 61.043,93.786 61.087,93.83 ; 0504.5@69.452,93.031 69.452,93.797 69.418,93.83 ; 0505.5@77.86,93.031 77.86,93.814 77.877,93.83 ; P1.35@83.693,50.8 83.947,50.8 90.082,44.665 116.714,44.665 124.054,52.005 124.054,87.808 118.031,93.83 111.531,93.83 ; 0506.5@86.269,93.031 86.269,93.794 86.233,93.83 ; 0507.5@94.677,93.031 94.677,93.793 94.641,93.83 ; 0508.5@103.086,93.031 103.086,93.83 ; 0509.5@111.494,93.031 111.494,93.793 111.531,93.83 ; 44.247,93.83 52.578,93.83 ; 52.578,93.83 61.087,93.83 ; 61.087,93.83 69.418,93.83 ; 69.418,93.83 77.877,93.83 ; 77.877,93.83 86.233,93.83 ; 86.233,93.83 94.641,93.83 ; 94.641,93.83 103.086,93.83 ; 103.086,93.83 111.531,93.83
A05R: 0500.3 0501.3 0502.3 0503.3 0504.3 0505.3 0506.3 0507.3 0508.3 0509.3 P1.33 | length 186
  Top Layer w0.203: 0500.3@35.817,94.631 35.817,95.44 35.814,95.443 44.272,95.43 ; 0501.3@44.226,94.631 44.226,95.384 44.272,95.43 ; 0502.3@52.634,94.631 52.634,95.385 52.68,95.43 ; 0503.3@61.043,94.631 61.043,95.347 60.96,95.43 ; 0504.3@69.452,94.631 69.452,95.422 69.444,95.43 ; 0505.3@77.86,94.631 77.86,95.312 77.978,95.43 ; P1.33@81.153,50.8 87.745,44.208 116.903,44.208 124.511,51.815 124.511,89.052 118.133,95.43 111.557,95.43 ; 0506.3@86.269,94.631 86.269,95.389 86.309,95.43 ; 0507.3@94.677,94.631 94.677,95.419 94.666,95.43 ; 0508.3@103.086,94.631 103.086,95.405 103.111,95.43 ; 0509.3@111.494,94.631 111.494,95.368 111.557,95.43 ; 44.272,95.43 52.68,95.43 ; 52.68,95.43 60.96,95.43 ; 60.96,95.43 69.444,95.43 ; 69.444,95.43 77.978,95.43 ; 77.978,95.43 86.309,95.43 ; 86.309,95.43 94.666,95.43 ; 94.666,95.43 103.111,95.43 ; 103.111,95.43 111.557,95.43
A06B: 0600.1 0601.1 0602.1 0603.1 0604.1 0605.1 0606.1 0607.1 0608.1 0609.1 P1.37 | length 172.7
  Top Layer w0.203: 0600.1@35.817,87.663 35.817,88.555 35.84,88.577 44.272,88.577 ; 0601.1@44.226,87.663 44.226,88.531 44.272,88.577 ; 0602.1@52.634,87.663 52.634,88.506 52.705,88.577 ; 0603.1@61.043,87.663 61.043,88.57 61.036,88.577 ; 0604.1@69.452,87.663 69.452,88.569 69.444,88.577 ; 0605.1@77.86,87.663 77.86,88.561 77.877,88.577 ; P1.37@86.233,50.8 91.911,45.122 116.525,45.122 123.596,52.194 123.596,82.956 117.976,88.577 111.532,88.577 ; 0606.1@86.269,87.663 86.269,88.567 86.259,88.577 ; 0607.1@94.677,87.663 94.677,88.563 94.691,88.577 ; 0608.1@103.086,87.663 103.086,88.551 103.111,88.577 ; 0609.1@111.494,87.663 111.494,88.54 111.532,88.577 ; 44.272,88.577 52.705,88.577 ; 52.705,88.577 61.036,88.577 ; 61.036,88.577 69.444,88.577 ; 69.444,88.577 77.877,88.577 ; 77.877,88.577 86.259,88.577 ; 86.259,88.577 94.691,88.577 ; 94.691,88.577 103.111,88.577 ; 103.111,88.577 111.532,88.577
A06G: 0600.5 0601.5 0602.5 0603.5 0604.5 0605.5 0606.5 0607.5 0608.5 0609.5 P1.41 | length 161.1
  Top Layer w0.203: 0600.5@35.817,84.462 35.817,85.27 35.814,85.274 44.247,85.261 ; 0601.5@44.226,84.462 44.226,85.24 44.247,85.261 ; 0602.5@52.634,84.462 52.634,85.205 52.578,85.261 ; 0603.5@61.043,84.462 61.043,85.217 61.087,85.261 ; 0604.5@69.452,84.462 69.452,85.228 69.418,85.261 ; 0605.5@77.86,84.462 77.86,85.244 77.877,85.261 ; 0606.5@86.269,84.462 86.269,85.225 86.233,85.261 ; P1.41@91.313,50.8 96.076,46.037 116.146,46.037 122.682,52.573 122.682,80.797 118.219,85.261 111.531,85.261 ; 0607.5@94.677,84.462 94.677,85.224 94.641,85.261 ; 0608.5@103.086,84.462 103.086,85.261 ; 0609.5@111.494,84.462 111.494,85.224 111.531,85.261 ; 44.247,85.261 52.578,85.261 ; 52.578,85.261 61.087,85.261 ; 61.087,85.261 69.418,85.261 ; 69.418,85.261 77.877,85.261 ; 77.877,85.261 86.233,85.261 ; 86.233,85.261 94.641,85.261 ; 94.641,85.261 103.086,85.261 111.531,85.261
A06R: 0600.3 0601.3 0602.3 0603.3 0604.3 0605.3 0606.3 0607.3 0608.3 0609.3 P1.39 | length 166.4
  Top Layer w0.203: 0600.3@35.817,86.062 35.817,86.871 35.814,86.874 44.272,86.861 ; 0601.3@44.226,86.062 44.226,86.815 44.272,86.861 ; 0602.3@52.634,86.062 52.634,86.816 52.68,86.861 ; 0603.3@61.043,86.062 61.043,86.778 60.96,86.861 ; 0604.3@69.452,86.062 69.452,86.853 69.444,86.861 ; 0605.3@77.86,86.062 77.86,86.743 77.978,86.861 ; 0606.3@86.269,86.062 86.269,86.82 86.309,86.861 ; P1.39@88.773,50.8 93.993,45.58 116.335,45.58 123.139,52.383 123.139,81.864 118.142,86.861 111.557,86.861 ; 0607.3@94.677,86.062 94.677,86.85 94.666,86.861 ; 0608.3@103.086,86.062 103.086,86.835 103.111,86.861 ; 0609.3@111.494,86.062 111.494,86.799 111.557,86.861 ; 44.272,86.861 52.68,86.861 ; 52.68,86.861 60.96,86.861 ; 60.96,86.861 69.444,86.861 ; 69.444,86.861 77.978,86.861 ; 77.978,86.861 86.309,86.861 ; 86.309,86.861 94.666,86.861 ; 94.666,86.861 103.111,86.861 ; 103.111,86.861 111.557,86.861
A07B: 0700.1 0701.1 0702.1 0703.1 0704.1 0705.1 0706.1 0707.1 0708.1 0709.1 P1.43 | length 153.1
  Top Layer w0.203: 0700.1@35.817,79.093 35.817,79.986 35.84,80.008 44.272,80.008 ; 0701.1@44.226,79.093 44.226,79.962 44.272,80.008 ; 0702.1@52.634,79.093 52.634,79.937 52.705,80.008 ; 0703.1@61.043,79.093 61.043,80.001 61.036,80.008 ; 0704.1@69.452,79.093 69.452,80 69.444,80.008 ; 0705.1@77.86,79.093 77.86,79.992 77.877,80.008 ; 0706.1@86.269,79.093 86.269,79.998 86.259,80.008 ; P1.43@93.853,50.8 98.159,46.494 115.957,46.494 122.225,52.762 122.225,75.743 117.96,80.008 111.532,80.008 ; 0707.1@94.677,79.093 94.677,79.994 94.691,80.008 ; 0708.1@103.086,79.093 103.086,79.982 103.111,80.008 ; 0709.1@111.494,79.093 111.494,79.971 111.532,80.008 ; 44.272,80.008 52.705,80.008 ; 52.705,80.008 61.036,80.008 ; 61.036,80.008 69.444,80.008 ; 69.444,80.008 77.877,80.008 ; 77.877,80.008 86.259,80.008 ; 86.259,80.008 94.691,80.008 ; 94.691,80.008 103.111,80.008 ; 103.111,80.008 111.532,80.008
A07G: 0700.5 0701.5 0702.5 0703.5 0704.5 0705.5 0706.5 0707.5 0708.5 0709.5 P1.47 | length 141.4
  Top Layer w0.203: 0700.5@35.817,75.893 35.817,76.701 35.814,76.705 44.247,76.692 ; 0701.5@44.226,75.893 44.226,76.671 44.247,76.692 ; 0702.5@52.634,75.893 52.634,76.635 52.578,76.692 ; 0703.5@61.043,75.893 61.043,76.648 61.087,76.692 ; 0704.5@69.452,75.893 69.452,76.659 69.418,76.692 ; 0705.5@77.86,75.893 77.86,76.675 77.877,76.692 ; 0706.5@86.269,75.893 86.269,76.656 86.233,76.692 ; 0707.5@94.677,75.893 94.677,76.655 94.641,76.692 ; P1.47@98.933,50.8 99.238,50.8 100.261,49.853 101.549,48.565 102.629,47.408 115.578,47.408 121.31,53.141 121.31,73.467 118.086,76.692 111.531,76.692 ; 0708.5@103.086,75.893 103.086,76.692 ; 0709.5@111.494,75.893 111.494,76.655 111.531,76.692 ; 44.247,76.692 52.578,76.692 ; 52.578,76.692 61.087,76.692 ; 61.087,76.692 69.418,76.692 ; 69.418,76.692 77.877,76.692 ; 77.877,76.692 86.233,76.692 ; 86.233,76.692 94.641,76.692 ; 94.641,76.692 103.086,76.692 ; 103.086,76.692 111.531,76.692
A07R: 0700.3 0701.3 0702.3 0703.3 0704.3 0705.3 0706.3 0707.3 0708.3 0709.3 P1.45 | length 146.8
  Top Layer w0.203: 0700.3@35.817,77.493 35.817,78.302 35.814,78.305 44.272,78.292 ; 0701.3@44.226,77.493 44.226,78.246 44.272,78.292 ; 0702.3@52.634,77.493 52.634,78.247 52.68,78.292 ; 0703.3@61.043,77.493 61.043,78.209 60.96,78.292 ; 0704.3@69.452,77.493 69.452,78.284 69.444,78.292 ; 0705.3@77.86,77.493 77.86,78.174 77.978,78.292 ; 0706.3@86.269,77.493 86.269,78.251 86.309,78.292 ; 0707.3@94.677,77.493 94.677,78.281 94.666,78.292 ; P1.45@96.393,50.8 100.242,46.951 115.767,46.951 121.768,52.952 121.768,74.636 118.111,78.292 111.557,78.292 ; 0708.3@103.086,77.493 103.086,78.266 103.111,78.292 ; 0709.3@111.494,77.493 111.494,78.23 111.557,78.292 ; 44.272,78.292 52.68,78.292 ; 52.68,78.292 60.96,78.292 ; 60.96,78.292 69.444,78.292 ; 69.444,78.292 77.978,78.292 ; 77.978,78.292 86.309,78.292 ; 86.309,78.292 94.666,78.292 ; 94.666,78.292 103.111,78.292 ; 103.111,78.292 111.557,78.292
A08B: 0800.1 0801.1 0802.1 0803.1 0804.1 0805.1 0806.1 0807.1 0808.1 0809.1 P1.49 | length 133.6
  Top Layer w0.203: 0800.1@35.817,70.524 35.817,71.417 35.84,71.439 44.272,71.439 ; 0801.1@44.226,70.524 44.226,71.392 44.272,71.439 ; 0802.1@52.634,70.524 52.634,71.368 52.705,71.439 ; 0803.1@61.043,70.524 61.043,71.432 61.036,71.439 ; 0804.1@69.452,70.524 69.452,71.431 69.444,71.439 ; 0805.1@77.86,70.524 77.86,71.422 77.877,71.439 ; 0806.1@86.269,70.524 86.269,71.429 86.259,71.439 ; 0807.1@94.677,70.524 94.677,71.425 94.691,71.439 ; P1.49@101.473,50.8 104.407,47.866 115.388,47.866 120.853,53.33 120.853,68.697 118.111,71.439 111.532,71.439 ; 0808.1@103.086,70.524 103.086,71.413 103.111,71.439 ; 0809.1@111.494,70.524 111.494,71.402 111.532,71.439 ; 44.272,71.439 52.705,71.439 ; 52.705,71.439 61.036,71.439 ; 61.036,71.439 69.444,71.439 ; 69.444,71.439 77.877,71.439 ; 77.877,71.439 86.259,71.439 ; 86.259,71.439 94.691,71.439 ; 94.691,71.439 103.111,71.439 ; 103.111,71.439 111.532,71.439
A08G: 0800.5 0801.5 0802.5 0803.5 0804.5 0805.5 0806.5 0807.5 0808.5 0809.5 P1.53 | length 121.8
  Top Layer w0.203: 0800.5@35.817,67.324 35.817,68.132 35.814,68.136 44.247,68.123 ; 0801.5@44.226,67.324 44.226,68.102 44.247,68.123 ; 0802.5@52.634,67.324 52.634,68.066 52.578,68.123 ; 0803.5@61.043,67.324 61.043,68.079 61.087,68.123 ; 0804.5@69.452,67.324 69.452,68.09 69.418,68.123 ; 0805.5@77.86,67.324 77.86,68.106 77.877,68.123 ; 0806.5@86.269,67.324 86.269,68.087 86.233,68.123 ; 0807.5@94.677,67.324 94.677,68.086 94.641,68.123 ; 0808.5@103.086,67.324 103.086,68.123 ; P1.53@106.553,50.8 108.573,48.78 115.01,48.78 119.939,53.709 119.939,66.167 117.983,68.123 111.531,68.123 ; 0809.5@111.494,67.324 111.494,68.086 111.531,68.123 ; 44.247,68.123 52.578,68.123 ; 52.578,68.123 61.087,68.123 ; 61.087,68.123 69.418,68.123 ; 69.418,68.123 77.877,68.123 ; 77.877,68.123 86.233,68.123 ; 86.233,68.123 94.641,68.123 ; 94.641,68.123 103.086,68.123 ; 103.086,68.123 111.531,68.123
A08R: 0800.3 0801.3 0802.3 0803.3 0804.3 0805.3 0806.3 0807.3 0808.3 0809.3 P1.51 | length 127.2
  Top Layer w0.203: 0800.3@35.817,68.924 35.817,69.733 35.814,69.736 44.272,69.723 ; 0801.3@44.226,68.924 44.226,69.677 44.272,69.723 ; 0802.3@52.634,68.924 52.634,69.678 52.68,69.723 ; 0803.3@61.043,68.924 61.043,69.64 60.96,69.723 ; 0804.3@69.452,68.924 69.452,69.715 69.444,69.723 ; 0805.3@77.86,68.924 77.86,69.605 77.978,69.723 ; 0806.3@86.269,68.924 86.269,69.682 86.309,69.723 ; 0807.3@94.677,68.924 94.677,69.712 94.666,69.723 ; 0808.3@103.086,68.924 103.086,69.697 103.111,69.723 ; P1.51@104.013,50.8 106.49,48.323 115.199,48.323 120.396,53.52 120.396,67.437 118.11,69.723 111.557,69.723 ; 0809.3@111.494,68.924 111.494,69.661 111.557,69.723 ; 44.272,69.723 52.68,69.723 ; 52.68,69.723 60.96,69.723 ; 60.96,69.723 69.444,69.723 ; 69.444,69.723 77.978,69.723 ; 77.978,69.723 86.309,69.723 ; 86.309,69.723 94.666,69.723 ; 94.666,69.723 103.111,69.723 ; 103.111,69.723 111.557,69.723
A09B: 0900.1 0901.1 0902.1 0903.1 0904.1 0905.1 0906.1 0907.1 0908.1 0909.1 P1.55 | length 114.2
  Top Layer w0.203: 0900.1@35.817,61.955 35.817,62.848 35.84,62.87 44.272,62.87 ; 0901.1@44.226,61.955 44.226,62.823 44.272,62.87 ; 0902.1@52.634,61.955 52.634,62.799 52.705,62.87 ; 0903.1@61.043,61.955 61.043,62.863 61.036,62.87 ; 0904.1@69.452,61.955 69.452,62.862 69.444,62.87 ; 0905.1@77.86,61.955 77.86,62.853 77.877,62.87 ; 0906.1@86.269,61.955 86.269,62.86 86.259,62.87 ; 0907.1@94.677,61.955 94.677,62.856 94.691,62.87 ; 102.832,62.883 118.015,62.883 119.431,61.468 119.431,53.848 114.82,49.237 110.656,49.237 P1.55@109.093,50.8 ; 0908.1@103.086,61.955 103.086,62.844 103.111,62.87 94.691,62.87 ; 0909.1@111.494,61.955 111.494,62.833 ; 44.272,62.87 52.705,62.87 ; 52.705,62.87 61.036,62.87 ; 61.036,62.87 69.444,62.87 ; 69.444,62.87 77.877,62.87 ; 77.877,62.87 86.259,62.87 ; 86.259,62.87 94.691,62.87
A09G: 0900.5 0901.5 0902.5 0903.5 0904.5 0905.5 0906.5 0907.5 0908.5 0909.5 P1.59 | length 101.6
  Top Layer w0.203: 0900.5@35.817,58.755 35.817,59.563 35.814,59.567 44.247,59.554 ; 0901.5@44.226,58.755 44.226,59.533 44.247,59.554 ; 0902.5@52.634,58.755 52.634,59.497 52.578,59.554 ; 0903.5@61.043,58.755 61.043,59.51 61.087,59.554 ; 0904.5@69.452,58.755 69.452,59.521 69.418,59.554 ; 0905.5@77.86,58.755 77.86,59.537 77.877,59.554 ; 0906.5@86.269,58.755 86.269,59.518 86.233,59.554 ; 0907.5@94.677,58.755 94.677,59.517 94.641,59.554 ; 102.806,59.567 117.928,59.567 118.415,59.08 118.415,54.356 114.859,50.8 P1.59@114.173,50.8 ; 0908.5@103.086,58.755 103.086,59.554 94.641,59.554 ; 0909.5@111.494,58.755 111.494,59.517 ; 44.247,59.554 52.578,59.554 ; 52.578,59.554 61.087,59.554 ; 61.087,59.554 69.418,59.554 ; 69.418,59.554 77.877,59.554 ; 77.877,59.554 86.233,59.554 ; 86.233,59.554 94.641,59.554